# EAGLE board dc_jck (EAGLE 8.5.0)
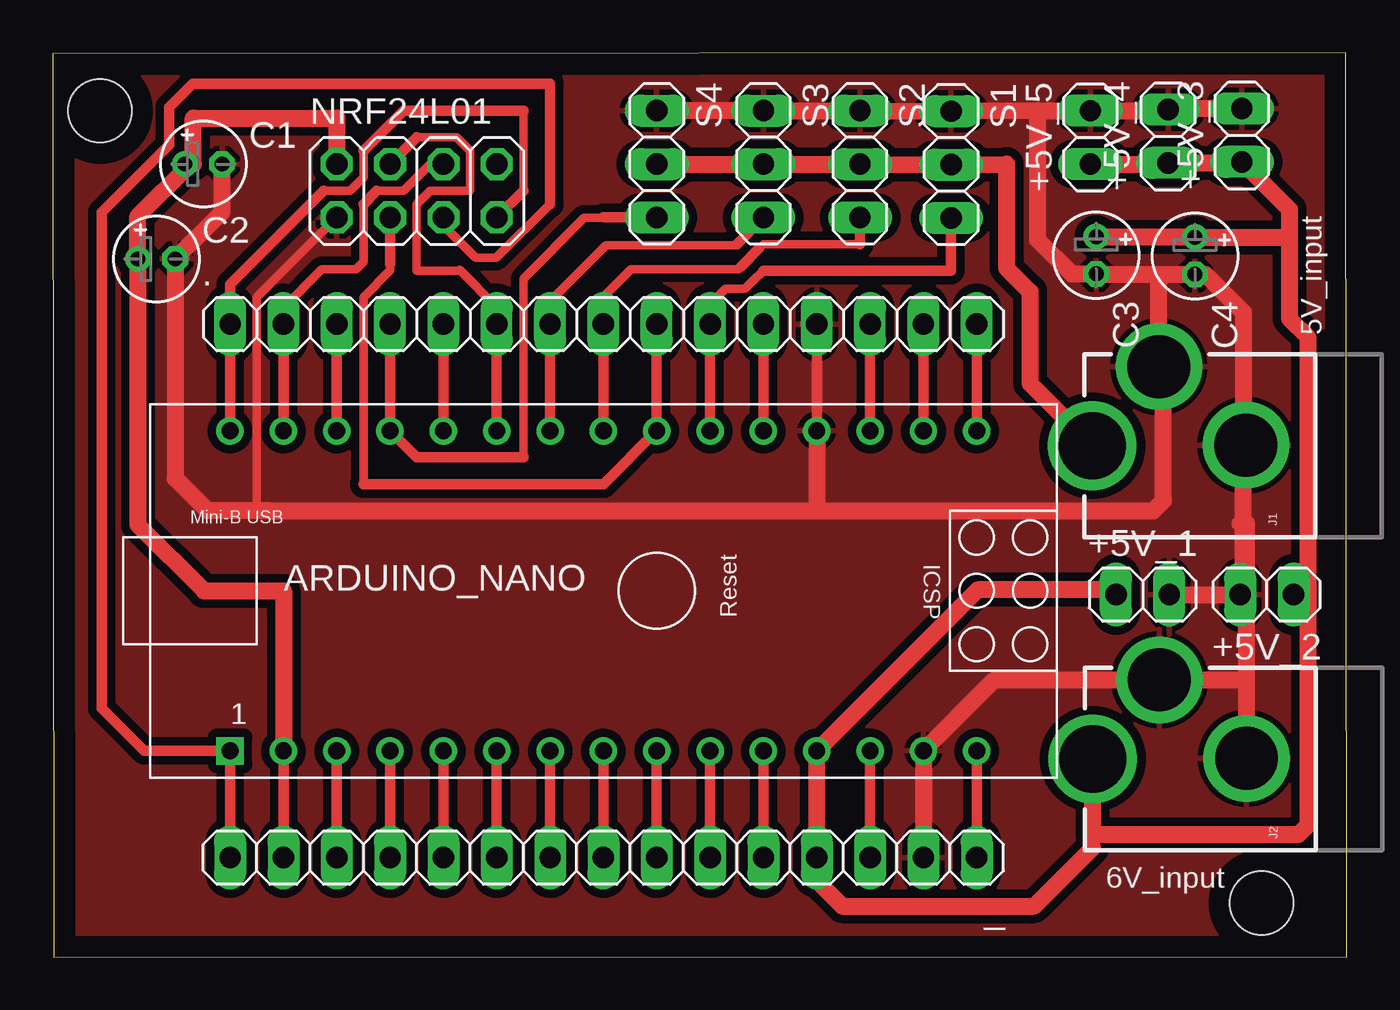
[diagram p0: board, top side]

Size 61.65 x 43.08 mm. Coordinates in mm from the lower left corner, seen from the top.
Outline: 0.05,0.03 61.65,0 61.6,43.08 0,43.03 0.05,0.03
Copper layers (1*16): Top 0.035mm / dielectric 1.5mm / Bottom 0.035mm
Design rules "default *": minimum track width 6mil, minimum drill 0.35mm, track to track 0.3mm, track to pad 0.3mm, pad to pad 0.3mm, via to via 0.3mm, smd to smd 0.3mm, copper to edge 40mil, drill to drill 6mil, minimum pad ring 10mil, minimum via ring 8mil, stop-mask expansion 4mil, vias tented up to drill 0mil, thermal gap 10mil
Holes 3 mm at 57.58,2.59 2.26,40.31

## Footprints (pad centres in the part's own frame; a part is rotated, then mirrored left to right if it is on the bottom)
1X02 = drill 1.016 long: 1 -1.27,0; 2 1.27,0
1X15 = drill 1.016 long: 1 -17.78,0; 2 -15.24,0; 3 -12.7,0; 4 -10.16,0; 5 -7.62,0; 6 -5.08,0; 7 -2.54,0; 8 0,0; 9 2.54,0; 10 5.08,0; 11 7.62,0; 12 10.16,0; 13 12.7,0; 14 15.24,0; 15 17.78,0
ARDUINO_NANO = drill 0.8 square: 1 -20.32,-7.62 | drill 0.8: 2 -17.78,-7.62; 3 -15.24,-7.62; 4 -12.7,-7.62; 5 -10.16,-7.62; 6 -7.62,-7.62; 7 -5.08,-7.62; 8 -2.54,-7.62; 9 0,-7.62; 10 2.54,-7.62; 11 5.08,-7.62; 12 7.62,-7.62; 13 10.16,-7.62; 14 12.7,-7.62; 15 15.24,-7.62; 16 15.24,7.62; 17 12.7,7.62; 18 10.16,7.62; 19 7.62,7.62; 20 5.08,7.62; 21 2.54,7.62; 22 0,7.62; 23 -2.54,7.62; 24 -5.08,7.62; 25 -7.62,7.62; 26 -10.16,7.62; 27 -12.7,7.62; 28 -15.24,7.62; 29 -17.78,7.62; 30 -20.32,7.62
E1,8-4 = drill 0.711 pad 1.168: + -0.889,0 | drill 0.711 pad 1.168 octagon: - 0.889,0
POWER_JACK_PTH_LOCK = drill 2.997 pad 4.115: GND 0.025,6.557; GNDBREAK 3.762,10.7 | drill 3.2 pad 4.115: PWR 0,13.878
2X04 = drill 1.016 octagon: 1 -3.81,-1.27; 2 -3.81,1.27; 3 -1.27,-1.27; 4 -1.27,1.27; 5 1.27,-1.27; 6 1.27,1.27; 7 3.81,-1.27; 8 3.81,1.27
1X03 = drill 1.016 long: 1 -2.54,0; 2 0,0; 3 2.54,0

## Placement (x,y rotation side)
+5V_1  [1X02]  51.92,17.27 0 top
+5V_2  [1X02]  57.84,17.27 180 top
+5V_3  [1X02]  56.64,39.14 90 top
+5V_4  [1X02]  53.14,39.09 90 top
+5V_5  [1X02]  49.43,39.04 90 top
.  [1X15]  26.24,30.15 0 top
_  [1X15]  26.24,4.75 180 top
ARDUINO_NANO  [ARDUINO_NANO]  28.78,17.45 0 top
C1  0.1uF  [E1,8-4]  7.19,37.77 0 top
C2  10uF  [E1,8-4]  4.95,33.25 0 top
C3  10uF  [E1,8-4]  49.71,33.43 270 top
C4  0.1uF  [E1,8-4]  54.41,33.4 270 top
J1  POWER_JACKPTH_LOCK  [POWER_JACK_PTH_LOCK]  63.4,24.36 90 top
J2  POWER_JACKPTH_LOCK  [POWER_JACK_PTH_LOCK]  63.42,9.45 90 top
NRF24L01  [2X04]  17.35,36.5 0 top
S1  [1X03]  42.8,37.74 270 top
S2  [1X03]  38.46,37.77 270 top
S3  [1X03]  33.86,37.77 270 top
S4  [1X03]  28.78,37.77 270 top

## Library data of the parts
+5V_1-+5V_5 . _ NRF24L01 S1-S4 = pinhead
ARDUINO_NANO = ArduinoNanoV30
C1-C4 = resistor
J1 J2 = SparkFun

## Nets
+3V3: _.14 ARDUINO_NANO.2 C1.+ C2.+ NRF24L01.2
+6V: J1.PWR S1.2 S2.2 S3.2 S4.2
CE: ..9 ARDUINO_NANO.22 NRF24L01.3
CSN: ..6 ARDUINO_NANO.25 NRF24L01.4
GND: +5V_1.2 +5V_2.2 +5V_3.2 +5V_4.2 +5V_5.2 ..12 _.2 ARDUINO_NANO.14 ARDUINO_NANO.19 C1.- C2.- C3.- C4.- J1.GND J1.GNDBREAK J2.GND J2.GNDBREAK NRF24L01.1 S1.1 S2.1 S3.1 S4.1
IRQ: NRF24L01.8
MISO: ..1 ARDUINO_NANO.30 NRF24L01.7
MOSI: ..2 ARDUINO_NANO.29 NRF24L01.6
N$2: ..3 ARDUINO_NANO.28
N$6: ..5 ARDUINO_NANO.26
N$12: ..11 ARDUINO_NANO.20
N$14: ..13 ARDUINO_NANO.18
N$15: ..14 ARDUINO_NANO.17
N$16: ..15 ARDUINO_NANO.16
N$17: _.1 ARDUINO_NANO.15
N$19: _.3 ARDUINO_NANO.13
N$21: _.5 ARDUINO_NANO.11
N$22: _.6 ARDUINO_NANO.10
N$23: _.7 ARDUINO_NANO.9
N$24: _.8 ARDUINO_NANO.8
N$25: _.9 ARDUINO_NANO.7
N$26: _.10 ARDUINO_NANO.6
N$27: _.11 ARDUINO_NANO.5
N$28: _.12 ARDUINO_NANO.4
N$29: _.13 ARDUINO_NANO.3
SCK: _.15 ARDUINO_NANO.1 NRF24L01.5
SERVO1: ..10 ARDUINO_NANO.21 S1.3
SERVO2: ..8 ARDUINO_NANO.23 S2.3
SERVO3: ..7 ARDUINO_NANO.24 S3.3
SERVO4: ..4 ARDUINO_NANO.27 S4.3
VCC: +5V_1.1 +5V_2.1 +5V_3.1 +5V_4.1 +5V_5.1 _.4 ARDUINO_NANO.12 C3.+ C4.+ J2.PWR

## Tracks (layer width: path | path; a pad name or v marks a point on that pad's centre or on a via)
+3V3
  Top 0.508: 6.55,37.77 C1.+ | ARDUINO_NANO.2 _.14
  Top 0.813: ARDUINO_NANO.2 11,17.45 7.21,17.45 4.06,20.6 C2.+ 4.06,35.28 6.55,37.77 | NRF24L01.2 13.54,39.95 6.71,39.95 6.71,37.77 C1.+
+6V
  Top 0.813: S4.2 S3.2 S2.2 S1.2 45.44,37.77 45.44,32.82 46.56,31.7 46.56,27.32 J1.PWR
CE
  Top 0.406: 14.81,22.53 14.81,31.42 14.81,31.44 16.08,32.7 16.08,33.02
  Top 0.508: ..9 ARDUINO_NANO.22 26.24,22.53 14.81,22.53 | 16.08,33.02 NRF24L01.3
CSN
  Top 0.406: 17.35,39.04 19.25,39.04 19.89,38.4 19.89,36.5 17.98,36.5 17.35,35.86 17.35,32.69 19.33,32.69 19.38,32.74 21.16,30.96 ..6
  Top 0.508: ..6 ARDUINO_NANO.25 | 17.35,39.04 NRF24L01.4
GND
  Top 0.406: 9.73,21.28 9.73,31.42 9.73,31.44 10.47,32.18 10.49,32.18 NRF24L01.1 | 56.87,16.97 +5V_2.2 +5V_1.2
  Top 0.508: ARDUINO_NANO.19 36.4,25.37 | 36.4,25.37 ..12 | 8.46,37.77 C1.- | 36.35,25.32 36.4,25.37 | +5V_4.2 53.19,40.41 | 10.34,21.28 10.36,21.26 | C3.- 49.73,32.51 | 52.7,32.51 52.71,32.51 | 52.91,27.91 J1.GNDBREAK | C4.- 54.92,32.51 | 9.73,21.28 9.68,21.28
  Top 0.813: S4.1 S3.1 S2.1 S1.1 46.91,40.31 | 10.36,21.26 36.4,21.26 | _.2 ARDUINO_NANO.14 44.86,13.21 J2.GNDBREAK 56.87,13.21 | 56.72,24.08 56.72,30.71 54.92,32.51 | 56.87,13.21 J2.GND | 46.91,40.31 47.5,40.31 +5V_5.2 53.09,40.31 53.19,40.41 +5V_3.2 | 56.87,13.21 56.87,16.97 56.87,20.65 56.57,20.65 | C1.- 8.08,35.48 C2.- 5.84,22.81 7.37,21.28 9.68,21.28 10.34,21.28 | ARDUINO_NANO.19 36.4,21.26 | C3.- 48.54,32.54 46.91,34.16 46.91,40.31 | 49.73,32.51 52.71,32.51 C4.- | J1.GNDBREAK 52.7,32.51 | 36.4,21.26 52.43,21.26 52.91,21.74 52.91,27.91 | J1.GND 56.84,24.08 56.72,24.08 | +5V_1.2 56.72,17.27 56.72,24.08
  pour Top (isolate 0.406): 0.61,42.42 61.14,42.42 61.14,0.53 0.61,0.53
MISO
  Top 0.406: 22.43,40.31 22.43,36.5 | 14.81,38.4 14.81,37.13 14.17,36.5 12.9,36.5
  Top 0.508: ARDUINO_NANO.30 ..1 8.46,32.05 12.9,36.5 | 22.43,36.5 NRF24L01.7 | 22.43,40.31 16.71,40.31 14.81,38.4
MOSI
  Top 0.406: NRF24L01.6 17.98,37.77 16.71,36.5 15.44,36.5 | 14.81,35.86 14.81,33.12 14.45,32.77 12.83,32.77 11,30.94 ..2
  Top 0.508: ARDUINO_NANO.29 ..2 | 14.81,35.86 15.44,36.5
N$2
  Top 0.508: ..3 ARDUINO_NANO.28
N$6
  Top 0.508: ..5 ARDUINO_NANO.26
N$12
  Top 0.508: ..11 ARDUINO_NANO.20
N$14
  Top 0.508: ARDUINO_NANO.18 ..13
N$15
  Top 0.508: ARDUINO_NANO.17 ..14
N$16
  Top 0.508: ARDUINO_NANO.16 ..15
N$17
  Top 0.508: _.1 ARDUINO_NANO.15
N$19
  Top 0.508: _.3 ARDUINO_NANO.13
N$21
  Top 0.508: ARDUINO_NANO.11 _.5
N$22
  Top 0.508: _.6 ARDUINO_NANO.10
N$23
  Top 0.508: ARDUINO_NANO.9 _.7
N$24
  Top 0.508: _.8 ARDUINO_NANO.8
N$25
  Top 0.508: ARDUINO_NANO.7 _.9
N$26
  Top 0.508: _.10 ARDUINO_NANO.6
N$27
  Top 0.508: ARDUINO_NANO.5 _.11
N$28
  Top 0.508: ARDUINO_NANO.4 _.12
N$29
  Top 0.508: ARDUINO_NANO.3 _.13
SCK
  Top 0.406: 23.7,35.86 21.13,33.3 20.14,33.3 18.62,34.82 NRF24L01.5
  Top 0.508: _.15 ARDUINO_NANO.1 4.37,9.83 2.35,11.85 2.35,35.47 5.56,38.68 5.56,40.46 6.68,41.58 23.7,41.58 23.7,35.86
SERVO1
  Top 0.406: ..10 31.32,31.09 32.06,31.83 32.98,31.83 33.33,32.18 33.35,32.18 33.86,32.69
  Top 0.508: ARDUINO_NANO.21 ..10 | S1.3 42.8,32.69 33.86,32.69
SERVO2
  Top 0.406: 33.66,33.76 33.86,33.96 38.46,33.96 | ..8 26.24,31.44 27.56,32.77 32.66,32.77 32.8,32.91
  Top 0.508: ARDUINO_NANO.23 ..8 | 32.8,32.91 33.66,33.76 | 38.46,33.96 S2.3
SERVO3
  Top 0.406: ..7 23.7,31.24 26.37,33.91 32.54,33.91 32.59,33.96
  Top 0.508: ..7 ARDUINO_NANO.24 | 32.59,33.96 S3.3
SERVO4
  Top 0.406: S4.3 28.75,35.2 25.32,35.2 22.43,32.31 22.43,23.8
  Top 0.508: ..4 ARDUINO_NANO.27 17.35,23.8 22.43,23.8 | 26.24,35.23 S4.3
VCC
  Top 0.508: 50.75,17.17 +5V_1.1 50.42,17.5 | 53.09,37.77 +5V_4.1 | 56.59,37.82 +5V_3.1 | +5V_2.1 59.77,17.27 | _.4 36.4,3.66 | 49.55,5.22 49.55,5.84 | 54.38,34.32 C4.+ | 58.85,34.29 58.9,34.24
  Top 0.813: +5V_5.1 53.09,37.77 | +5V_4.1 56.59,37.82 | +5V_3.1 58.9,35.61 58.9,34.24 58.9,30.4 59.77,29.53 59.77,17.27 59.77,6.28 59.33,5.84 49.55,5.84 49.55,7.12 J2.PWR | _.4 ARDUINO_NANO.12 44.07,17.5 50.42,17.5 | 36.4,3.66 37.62,2.44 46.76,2.44 49.55,5.22 | C3.+ 54.38,34.32 | C4.+ 58.85,34.29

## Text on the board
tNames: 5V_input | 6V_input